# Altium PCB Chess Clock Mainboard PCB.PcbDoc
Units mm, origin at the board's own origin, x right, y up, seen from the top; angles counter-clockwise.
Board outline 146 x 65 mm, 2 copper layers (Top Layer, Bottom Layer); 2 components, 3 nets, 8 pads, 0 vias.
Unrouted connection lines stored in the file: 1.
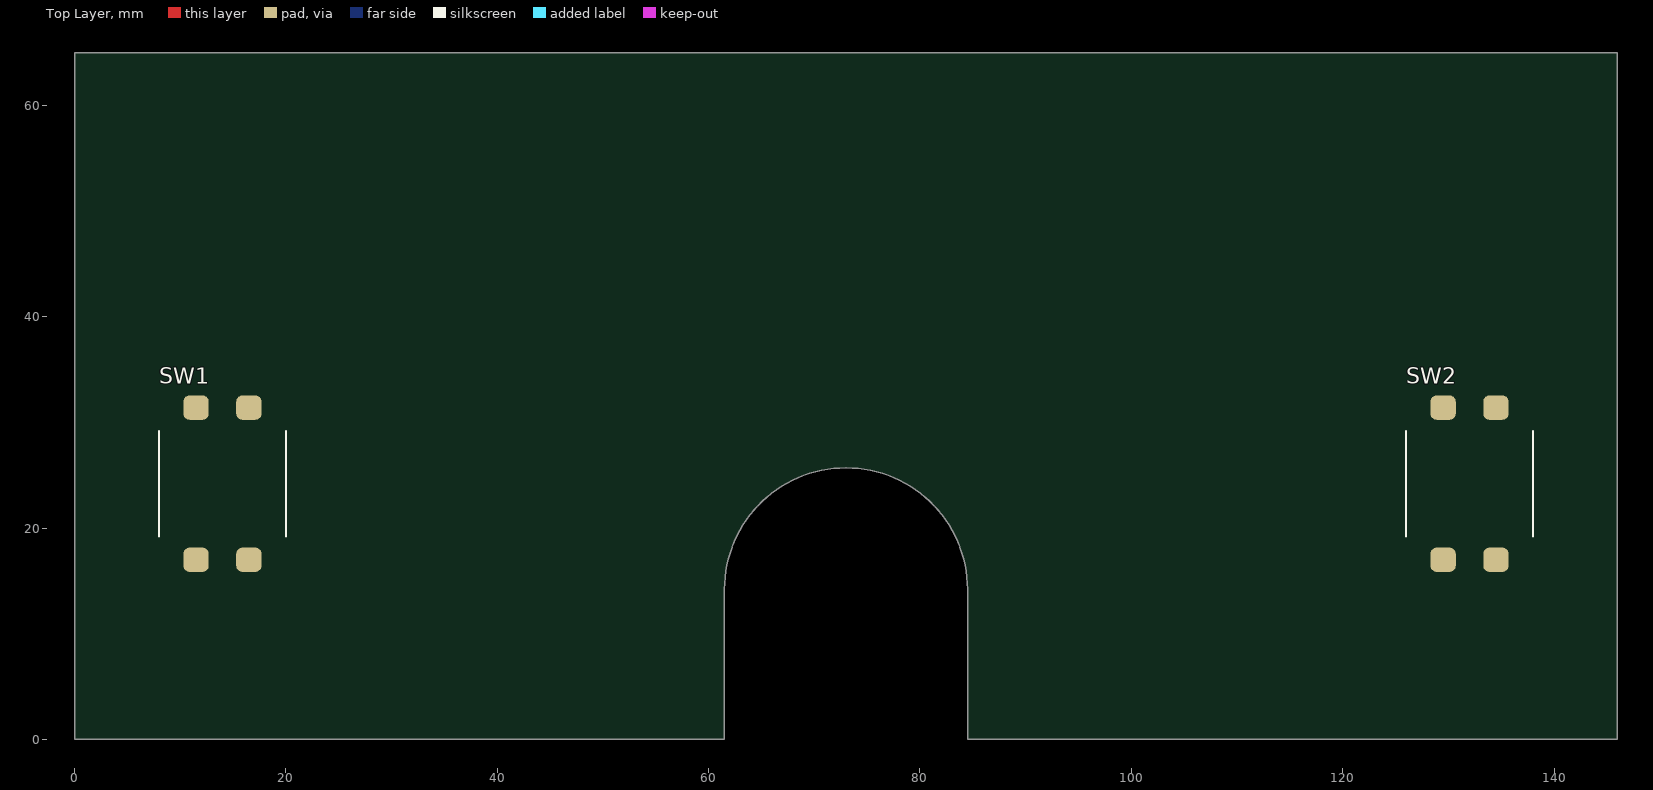
[diagram p0: Top Layer view]
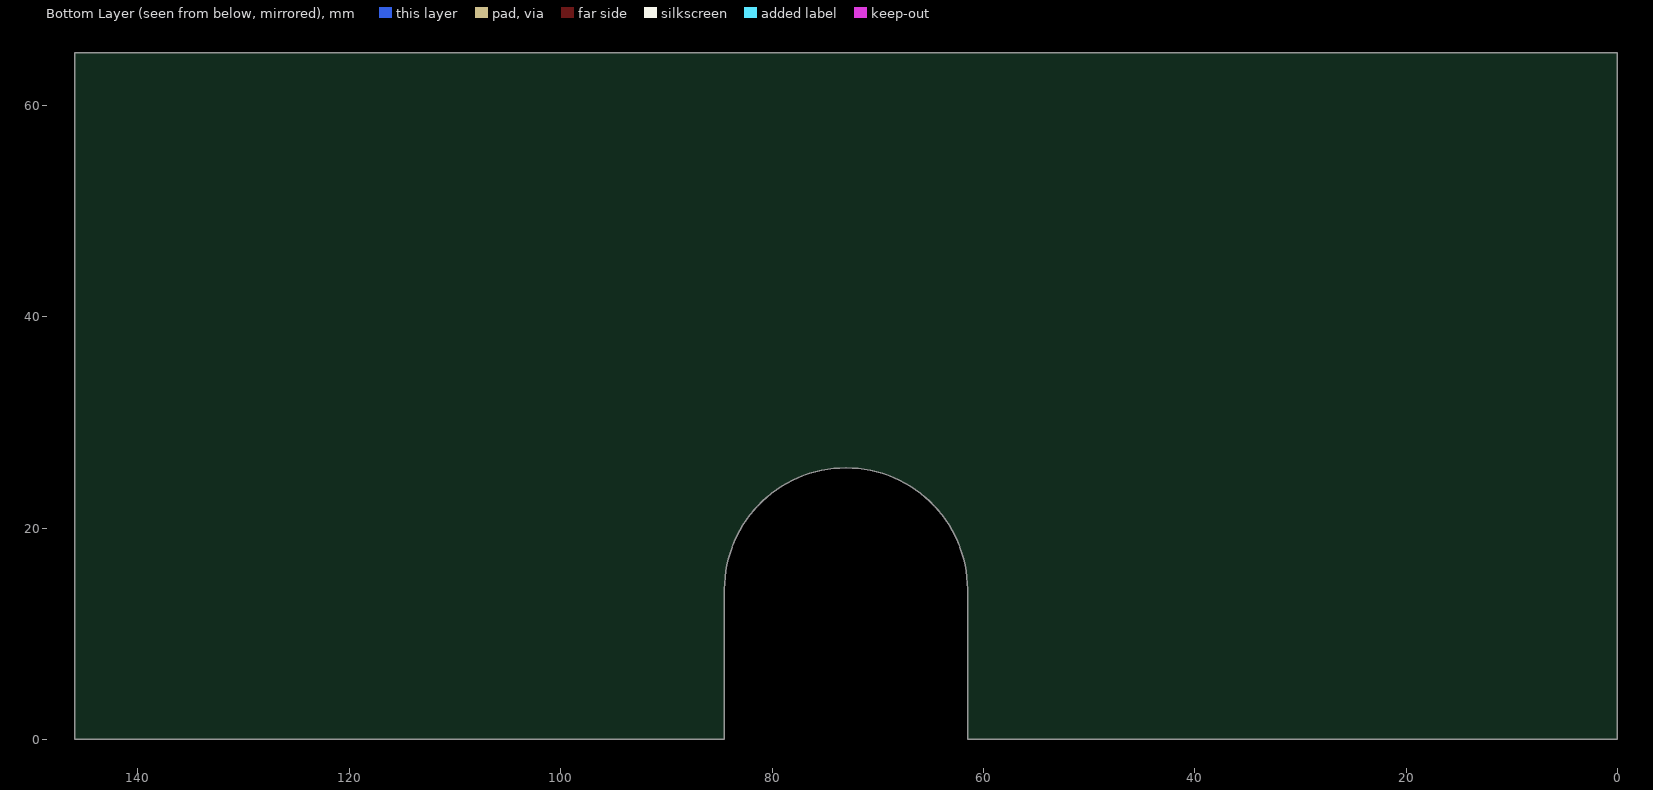
[diagram p1: Bottom Layer view, seen from below]

## Layer stack, top to bottom
Top Solder: solder mask 0.0102, Solder Resist, Dk 3.5
Top Layer: signal copper 0.0356
Dielectric 1: dielectric 0.32, FR-4, Dk 4.8
Bottom Layer: signal copper 0.0356
Bottom Solder: solder mask 0.0102, Solder Resist, Dk 3.5

## Board outline
0,0 0,65 146,65 146,0 84.5,0 84.5,14.2 ccw(c73,14.2) 61.5,14.2 61.5,0

## Design rules (kind name [scope] priority, off if disabled: settings)
Clearance [All] p1: gap=0.254 ignorepadtopadclearanceinfootprint=FALSE except(0: Arc-Hole Track-Hole SMDPad-Hole THPad-Hole Via-Hole Fill-Hole Poly-Hole Region-Hole Text-Hole)
PolygonConnect [All] p1: connectstyle=Relief reliefconductorwidth=0.254 reliefentries=4 polygonreliefangle="90 Angle" airgapwidth=0.254
RoutingVias [All] p1: holewidth=0.711 width=1.27 viastyle="Through Hole" minholewidth=0.711 minwidth=1.27 maxholewidth=0.711 maxwidth=1.27
SolderMaskExpansion [All] p1: expansion=0.102 istentingtop=FALSE
Width [All] p1: maxlimit=0.254 minlimit=0.254 preferedwidth=0.254
30 further rules are at their usual default settings.

## Components (designator, comment, footprint, x,y, rotation, side; value= is the part's Value field where it differs from the comment)
SW1 "12mm x 12mm x 4.3mm" TACTILE_SWITCH_12x12x4.3 14,24.2 r90 top locked
SW2 "12mm x 12mm x 4.3mm" TACTILE_SWITCH_12x12x4.3 132,24.2 r90 top locked

## Footprints (in the part's own frame and the unit in brackets; to place one, negate y for a bottom-side part, rotate by r counter-clockwise, add the part's x,y. Pads: shape width x height; smd on the part's side, far side on the other; paste and mask are expansions set on the pad)
TACTILE_SWITCH_12x12x4.3 [mm] "TACTILES WITCH 12x12x4.3mm"
  rrect50% 2.3x2.4 smd: 1(7.2,-2.5) 2(-7.2,-2.5) 3(7.2,2.5) 4(-7.2,2.5)
  silkscreen extent -5,-6 5,6, body extent -7.5,-6 7.5,6, height 4.31

## Part data
SW1 SW2: library part TactileSwitch_12x12x4.3, "Tactile Switch SPST-NO Top Actuated Surface Mount", Manufacturer=XUNPU, Manufacturer Part Number=UK-B0262-G4.3-160, Package="SMD 12x12", Supplier Part Number 1=-, Categories="Tactile Switches", Note=-, Supplier 1=-, Supplier 2=-, Supplier Part Number 2=-

## Nets (pads, with @x,y where several pads share a name; then routed paths per layer and width w, separated by ;. In a path a pad name is that pad's centre, name@x,y a point inside that pad or via, vN(x,y) a via of type N, cw(c..) or ccw(c..) an arc to the next point about the centre after c; other vN are vias at no path point)
GND: SW1.1 SW1.2 SW2.3 SW2.4
SW_L: SW1.3 SW1.4
SW_R: SW2.1 SW2.2

## Silkscreen, mask and mechanical layers (free items; w line width, h text height)
Mechanical 1:
  circle w0.1: c140,55 r1.9
  circle w0.1: c140,12 r1.9
  circle w0.1: c91,59 r1.9
  circle w0.1: c33.475,24.2 r1.927
  circle w0.1: c73,48.2 r1.9
  circle w0.1: c6,12 r1.9
  lines w0.1: 3.825,0.9 3.825,2.9 5.125,2.9 5.125,0.9 3.825,0.9 ; 3.825,23.2 3.825,25.2 5.125,25.2 5.125,23.2 3.825,23.2 ; 3.825,45.5 3.825,47.5 5.125,47.5 5.125,45.5 3.825,45.5 ; 9.5,33.21 59.5,33.21 59.5,38.29 9.5,38.29 9.5,33.21 ; 22.825,0.9 22.825,2.9 24.125,2.9 24.125,0.9 22.825,0.9 ; 22.825,23.2 22.825,25.2 24.125,25.2 24.125,23.2 22.825,23.2 ; 22.825,45.5 22.825,47.5 24.125,47.5 24.125,45.5 22.825,45.5 ; 41.825,0.9 41.825,2.9 43.125,2.9 43.125,0.9 41.825,0.9 ; 41.825,23.2 41.825,25.2 43.125,25.2 43.125,23.2 41.825,23.2 ; 41.825,45.5 41.825,47.5 43.125,47.5 43.125,45.5 41.825,45.5 ; 70.35,54.375 cw(c70.35,56.2) 70.35,58.025 75.65,58.025 cw(c75.65,56.2) 75.65,54.375 70.35,54.375 ; 102.875,0.9 102.875,2.9 104.175,2.9 104.175,0.9 102.875,0.9 ; 102.875,23.2 102.875,25.2 104.175,25.2 104.175,23.2 102.875,23.2 ; 102.875,45.5 102.875,47.5 104.175,47.5 104.175,45.5 102.875,45.5 ; 121.875,0.9 121.875,2.9 123.175,2.9 123.175,0.9 121.875,0.9 ; 121.875,23.2 121.875,25.2 123.175,25.2 123.175,23.2 121.875,23.2 ; 121.875,45.5 121.875,47.5 123.175,47.5 123.175,45.5 121.875,45.5 ; 140.875,0.9 140.875,2.9 142.175,2.9 142.175,0.9 140.875,0.9 ; 140.875,23.2 140.875,25.2 142.175,25.2 142.175,23.2 140.875,23.2 ; 140.875,45.5 140.875,47.5 142.175,47.5 142.175,45.5 140.875,45.5
  lines w0.8: 0,0 61.5,0 61.5,14.2 cw(c73,14.2) 84.5,14.2 84.5,0 146,0 146,65 0,65 0,0